# EAGLE board Placa_MTQ_brd (EAGLE 9.7.0)
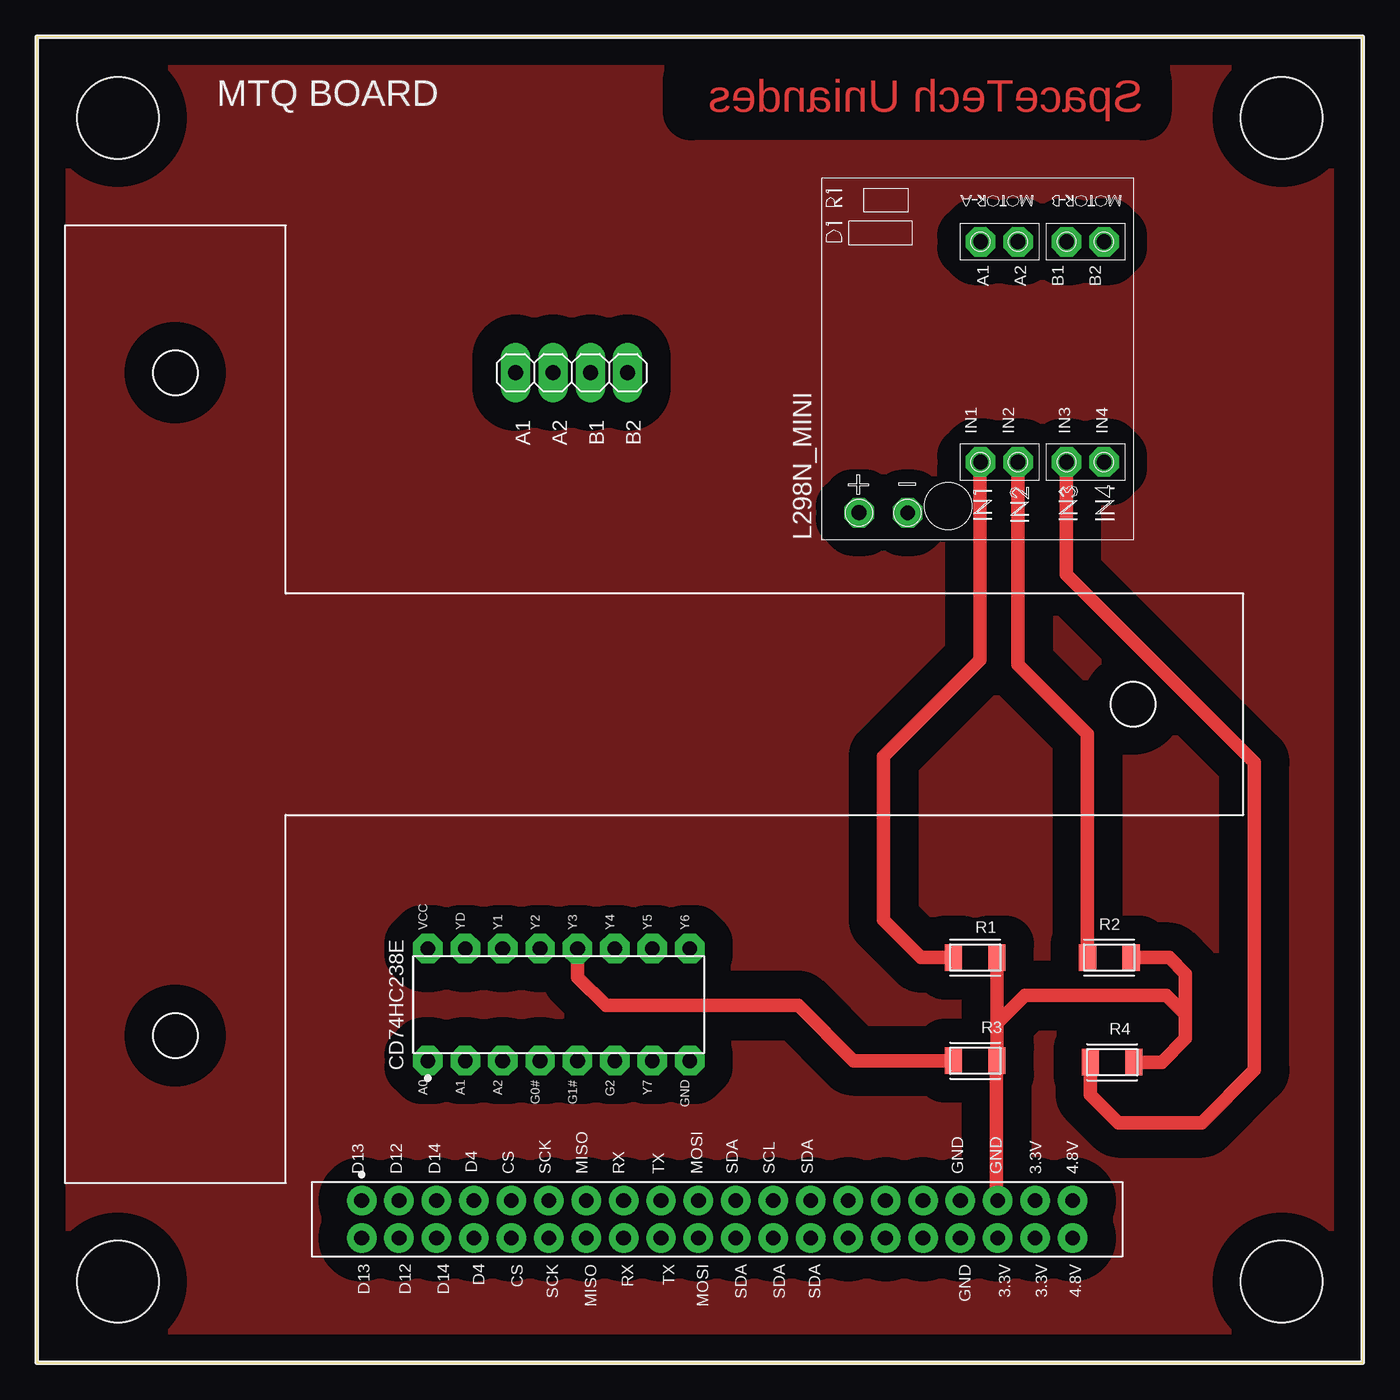
[diagram p0: board, top side]
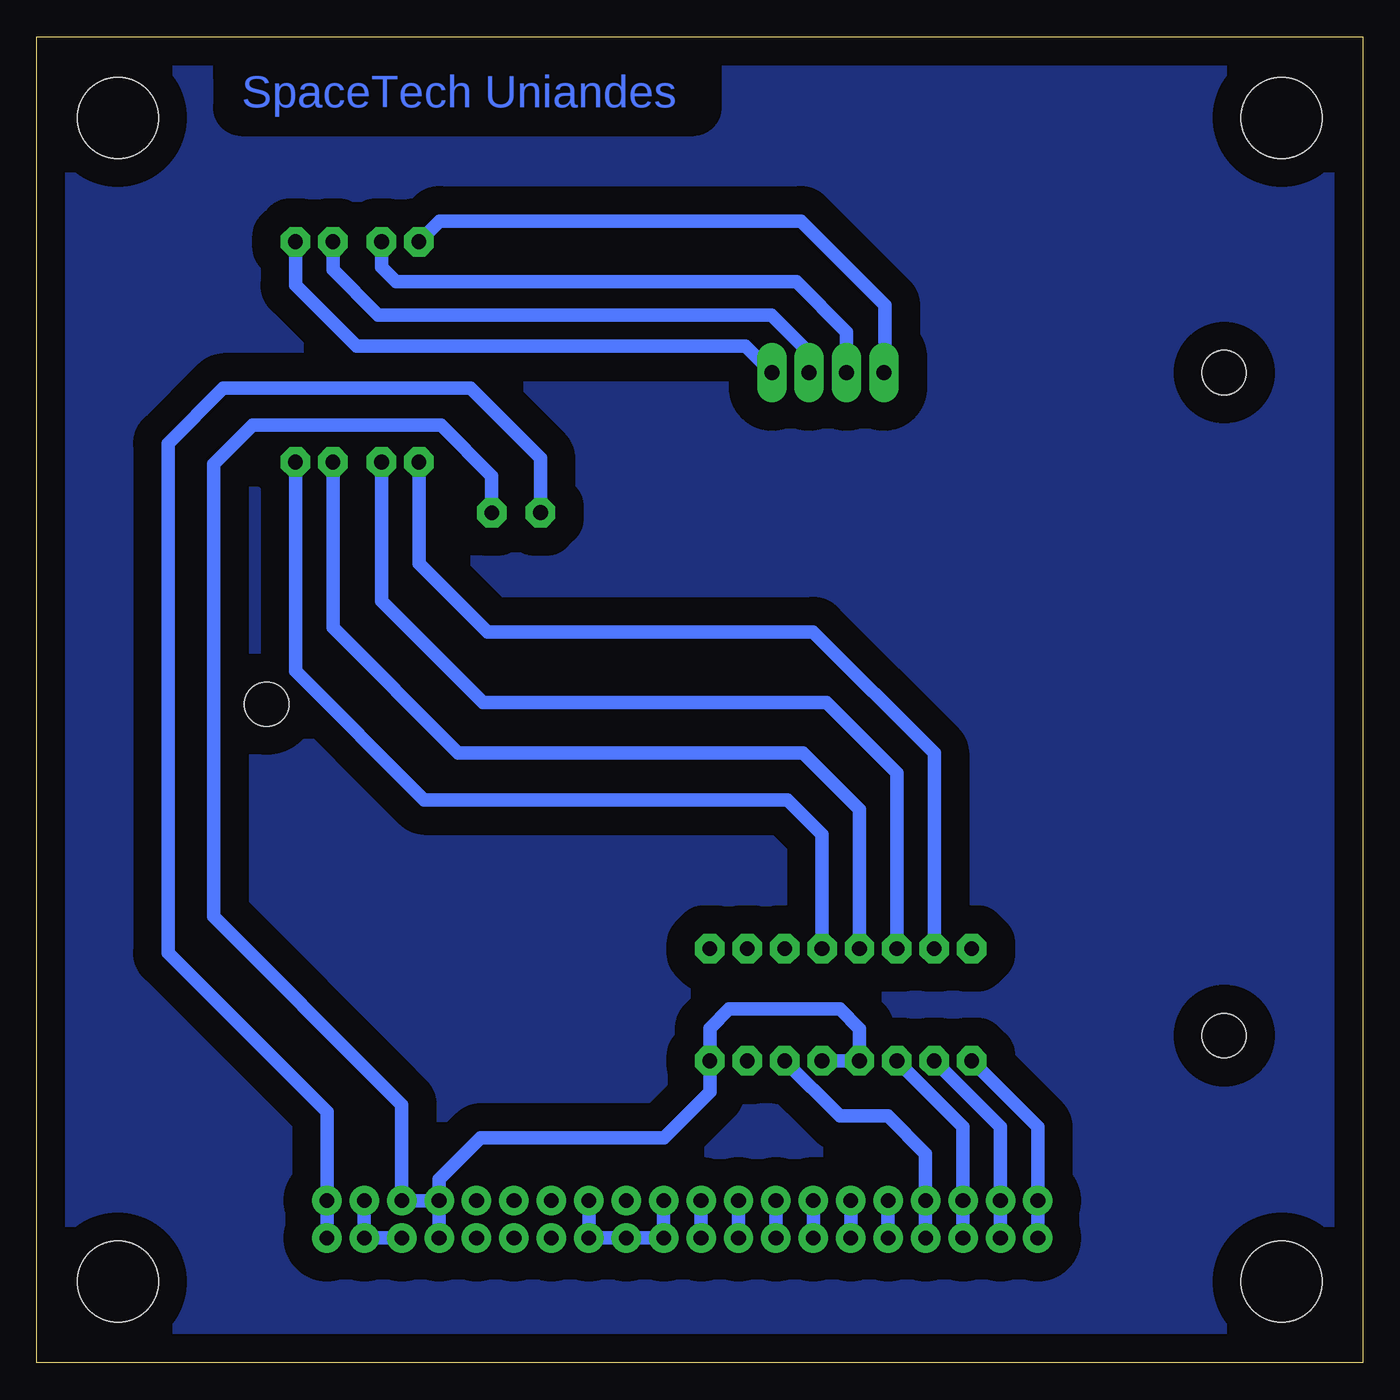
[diagram p1: board, bottom side, seen from below]

Size 90 x 90 mm. Coordinates in mm from the lower left corner, seen from the top.
Outline: 0,90 0,0 90,0 90,90 0,90
Copper layers (1*16): Top 0.035mm / dielectric 1.53mm / Bottom 0.035mm
Design rules "LCFI Uniandes DRC (Eagle-Fusion360 11-2022) *": minimum track width 10mil, minimum drill 0.6mm, track to track 0.3mm, track to pad 0.3mm, pad to pad 0.5mm, via to via 0.3mm, smd to smd 0.2mm, copper to edge 0.5mm, drill to drill 0.5mm, minimum pad ring 0.5mm, minimum via ring 0.3mm, stop-mask expansion 0.05mm, vias tented up to drill 0mil, thermal gap 0.3mm
Holes 5.5 mm at 5.5,84.5 84.5,84.5 5.5,5.5 84.5,5.5

## Footprints (pad centres in the part's own frame; a part is rotated, then mirrored left to right if it is on the bottom)
1X04 = drill 1.016 long: 1 -3.81,0; 2 -1.27,0; 3 1.27,0; 4 3.81,0
RES_SMD = smd 1.166 x 1.817: 1 -1.476,0; 2 1.476,0
CD74HC238E = drill 1 octagon: 1 -3.81,8.89; 2 -3.81,6.35; 3 -3.81,3.81; 4 -3.81,1.27; 5 -3.81,-1.27; 6 -3.81,-3.81; 7 -3.81,-6.35; 8 -3.81,-8.89; 9 3.81,-8.89; 10 3.81,-6.35; 11 3.81,-3.81; 12 3.81,-1.27; 13 3.81,1.27; 14 3.81,3.81; 15 3.81,6.35; 16 3.81,8.89
L298N_MINI = drill 1 octagon: A1 -10.49,-1.04; A2 -10.49,1.5; B1 -10.49,4.8; B2 -10.49,7.34; GND 7.91,-5.98; IN1 4.46,-1.04; IN2 4.46,1.5; IN3 4.46,4.8; IN4 4.46,7.34; VCC 7.9,-9.29
PINHEADER = drill 1 pad 1.676: 1 0,0; 2 2.54,0; 3 5.08,0; 4 7.62,0; 5 10.16,0; 6 12.7,0; 7 15.24,0; 8 17.78,0; 9 20.32,0; 10 22.86,0; 11 25.4,0; 12 27.94,0; 13 30.48,0; 14 33.02,0; 15 35.56,0; 16 38.1,0; 17 40.64,0; 18 43.18,0; 19 45.72,0; 20 48.26,0; 21 48.26,-2.54; 22 45.72,-2.54; 23 43.18,-2.54; 24 40.64,-2.54; 25 38.1,-2.54; 26 35.56,-2.54; 27 33.02,-2.54; 28 30.48,-2.54; 29 27.94,-2.54; 30 25.4,-2.54; 31 22.86,-2.54; 32 20.32,-2.54; 33 17.78,-2.54; 34 15.24,-2.54; 35 12.7,-2.54; 36 10.16,-2.54; 37 7.62,-2.54; 38 5.08,-2.54; 39 2.54,-2.54; 40 0,-2.54
CASE_MTQ = hole 3: 2.2,39; -20.3,-26; 24.7,-26

## Placement (x,y rotation side)
JP1  PINHD-1X4  [1X04]  36.3,67.2 0 top
R1  RES_SMD  [RES_SMD]  63.7,27.5 0 top
R2  RES_SMD  [RES_SMD]  72.8,27.5 0 top
R3  RES_SMD  [RES_SMD]  63.7,20.5 0 top
R4  RES_SMD  [RES_SMD]  73,20.4 0 top
U$1  CD74HC238E  [CD74HC238E]  35.43,24.3 90 top
U$2  L298N_MINI  [L298N_MINI]  65.1,65.6 270 top
U$3  PINHEADER  [PINHEADER]  22.05,11 0 top
U$8  CASE_MTQ  [CASE_MTQ]  35.4,46.9 270 top

## Library data of the parts
JP1 = Connector; CATEGORY: Headers; DESCRIPTION: Header, Straight, 4 Position; MANUFACTURER: Generic; MPN: Generic; OPERATING_TEMPERATURE: Generic; PART_STATUS: Active; PITCH: 0.100" (2.54mm); ROHS_COMPLIANCE: Generic; SERIES: Generic; SUB-CATEGORY: Headers, Male Pins; TYPE: Board to Board or Cable, Unshrouded, Through Hole, Straight
R1-R4 = RES_SMD
U$1 = CD74HC238E
U$2 = L298N_MINI
U$3 = PINHEADER-40
U$8 = CASE_MTQ

## Nets
3.3V: U$3.19 U$3.22 U$3.23
4.8V: U$2.VCC U$3.20 U$3.21
CS: U$3.5 U$3.36
D4: U$1.6 U$3.4 U$3.37
D12: U$1.2 U$3.2 U$3.39
D13: U$1.1 U$3.1 U$3.40
D14: U$1.3 U$3.3 U$3.38
GND: R1.2 R2.2 R3.2 R4.2 U$1.4 U$1.5 U$1.8 U$2.GND U$3.17 U$3.18 U$3.24
MISO: U$3.7 U$3.34
MOSI: U$3.10 U$3.31
N$1: R1.1 U$1.15 U$2.IN1
N$2: R4.1 U$1.13 U$2.IN3
N$3: R2.1 U$1.14 U$2.IN2
N$4: R3.1 U$1.12 U$2.IN4
N$6: JP1.1 U$2.A1
N$7: JP1.2 U$2.A2
N$8: JP1.3 U$2.B1
N$9: JP1.4 U$2.B2
RX: U$3.8 U$3.33
SCK: U$3.6 U$3.35
SCL: U$3.12
SDA: U$3.11 U$3.13 U$3.28 U$3.29 U$3.30
TX: U$3.9 U$3.32
VCC: U$1.16

## Tracks (layer width: path | path; a pad name or v marks a point on that pad's centre or on a via)
3.3V
  Bottom 0.9: U$3.19 U$3.22 U$3.23
4.8V
  Bottom 0.9: U$3.21 U$3.20 70.31,17.01 81.1,27.8 81.1,62.4 77.35,66.15 60.56,66.15 55.81,61.4 U$2.VCC
CS
  Bottom 0.9: U$3.36 U$3.5
D4
  Bottom 0.9: U$3.37 U$3.4 29.67,14.17 32.24,16.74 35.49,16.74 U$1.6
D12
  Bottom 0.9: U$3.39 U$3.2 24.59,15.99 U$1.2
D13
  Bottom 0.9: 22.05,16 22.05,14.46 U$3.40 | U$3.1 22.05,16 | 22.05,16 U$1.1
D14
  Bottom 0.9: U$3.38 U$3.3 27.13,15.99 U$1.3
GND
  Top 0.9: 77.97,23.93 77.97,24.43 77.97,26.4 76.88,27.5 R2.2 | 77.97,23.93 77.97,22 76.38,20.4 R4.2 | 77.97,23.93 77.67,23.93 76.67,24.93 75.17,24.93 67.08,24.93 65.17,23.02 R3.2 | U$3.18 65.13,11.1 65.13,20.5 R3.2 | R3.2 R1.2
  Bottom 0.9: U$3.17 U$3.18 65.23,17.5 65.97,18.24 65.97,18.25 78,30.28 78,61 75.36,63.64 62.57,63.64 59.12,60.19 U$2.GND | U$3.17 U$3.24 | U$1.5 U$1.4 34.16,22.66 35.5,24 43,24 44.32,22.68 44.32,21.5 U$1.8 44.32,18.37 47.44,15.25 59.88,15.25 62.69,12.44 U$3.17
MISO
  Bottom 0.9: U$3.34 U$3.7
MOSI
  Bottom 0.9: U$3.31 U$3.10
N$1
  Top 0.9: R1.1 60.02,27.5 57.48,30.05 57.48,41.16 64.02,47.7 64.02,61.1 U$2.IN1
  Bottom 0.9: U$2.IN1 64.06,54.26 59.4,49.6 37.3,49.6 29.08,41.38 U$1.15
N$2
  Top 0.9: R4.1 71.53,18.19 73.42,16.29 79.07,16.29 82.65,19.87 82.65,40.74 69.9,53.49 U$2.IN3
  Bottom 0.9: U$1.13 34.16,37.56 38,41.4 61.4,41.4 69.9,49.9 U$2.IN3
N$3
  Top 0.9: R2.1 71.33,42.67 66.6,47.4 U$2.IN2
  Bottom 0.9: U$2.IN2 66.6,51.7 59.7,44.8 36.4,44.8 31.62,40.02 U$1.14
N$4
  Top 0.9: R3.1 55.42,20.5 51.69,24.24 38.62,24.24 36.7,26.16 U$1.12
  Bottom 0.9: U$1.12 36.7,35.86 37.83,36.98 39.04,38.2 63.7,38.2 72.44,46.94 U$2.IN4
N$5
  pour Bottom (isolate 1.93): 0.45,0.45 89.55,0.45 89.55,89.55 0.45,89.55
N$6
  Bottom 0.9: JP1.1 32.42,67.27 32.42,71.78 38.13,77.49 62.66,77.49 U$2.A1
N$7
  Bottom 0.9: U$2.A2 66.6,74.35 65.62,73.37 38.45,73.37 35.03,69.95 JP1.2
N$8
  Bottom 0.9: U$2.B1 69.9,74.2 66.82,71.12 40.14,71.12 37.57,68.55 JP1.3
N$9
  Bottom 0.9: U$2.B2 72.44,73.14 68.3,69 41.91,69 JP1.4
N$10
  pour Top (isolate 1.93): 0.25,0.25 89.75,0.25 89.75,89.75 0.25,89.75
RX
  Bottom 0.9: U$3.33 U$3.8
SCK
  Bottom 0.9: U$3.35 U$3.6
SDA
  Bottom 0.9: U$3.11 U$3.30 U$3.29 U$3.28 U$3.13
TX
  Bottom 0.9: U$3.32 U$3.9

## Text on the board
Top: SpaceTech Uniandes
Bottom: SpaceTech Uniandes
tPlace: MTQ BOARD | A1 | A2 | B1 | B2 | D13 | D12 | D14 | D4 | CS | SCK | MISO | RX | TX | MOSI | SDA | SCL | SDA | GND | GND | 3.3V | 4.8V | D13 | D12 | D14 | D4 | CS | SCK | MISO | RX | TX | MOSI | SDA | SDA | SDA | GND | 3.3V | 3.3V | 4.8V